# Altium PCB Bopit.PcbDoc
Units mil, origin at the board's own origin, x right, y up, seen from the top; angles counter-clockwise.
Board outline 5765 x 1735 mil, 2 copper layers (Top Layer, Bottom Layer); 16 components, 19 nets, 78 pads, 0 vias.
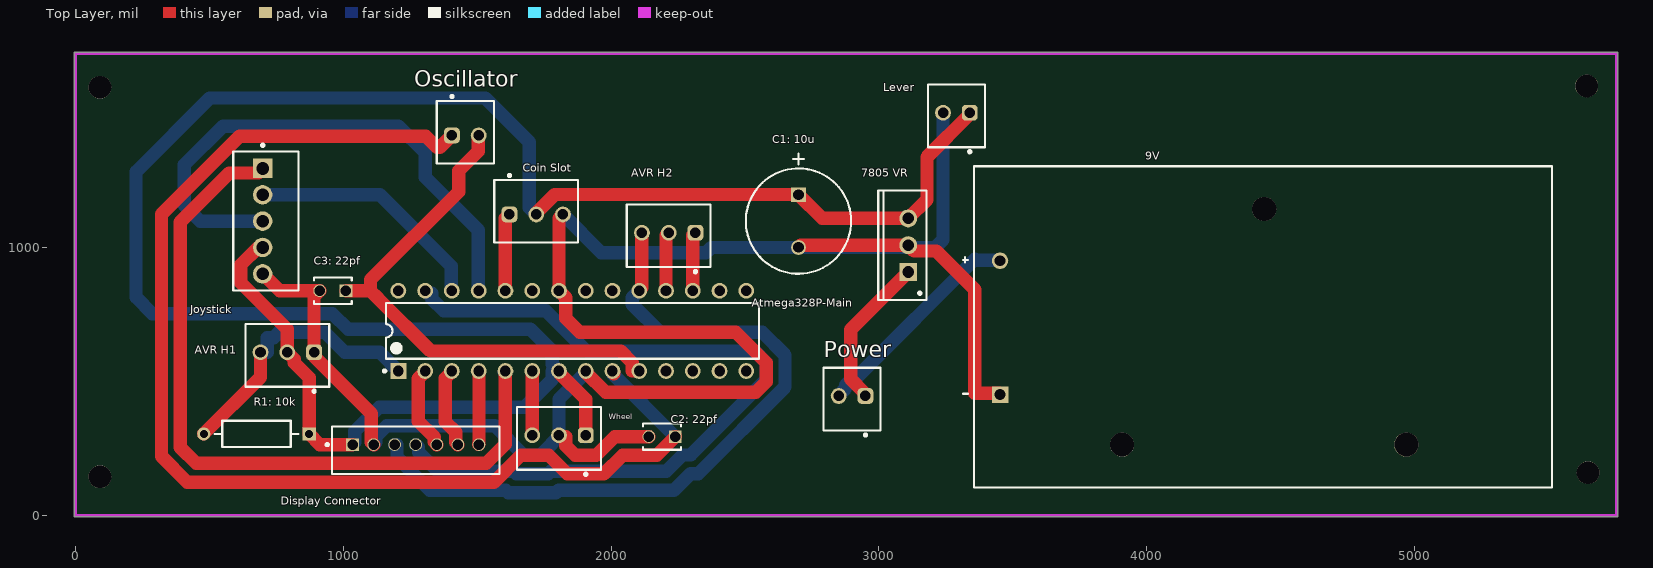
[diagram p0: Top Layer view]
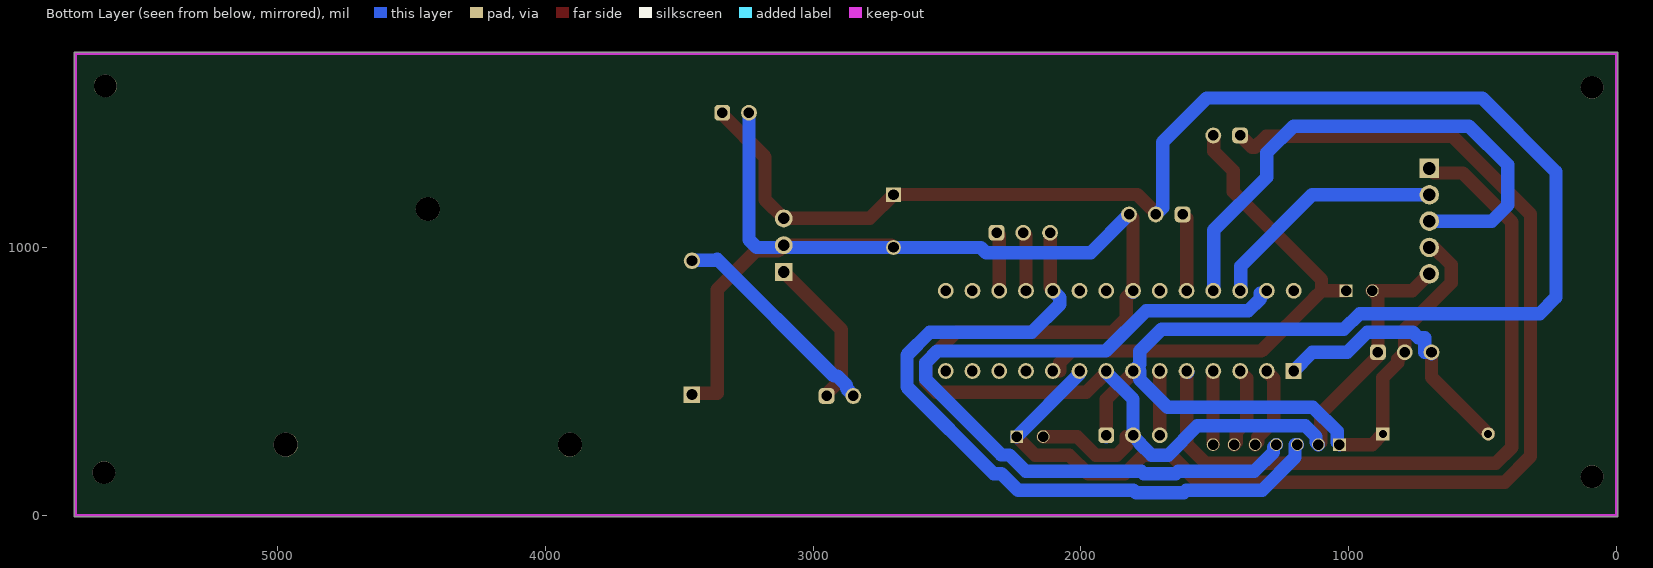
[diagram p1: Bottom Layer view, seen from below]
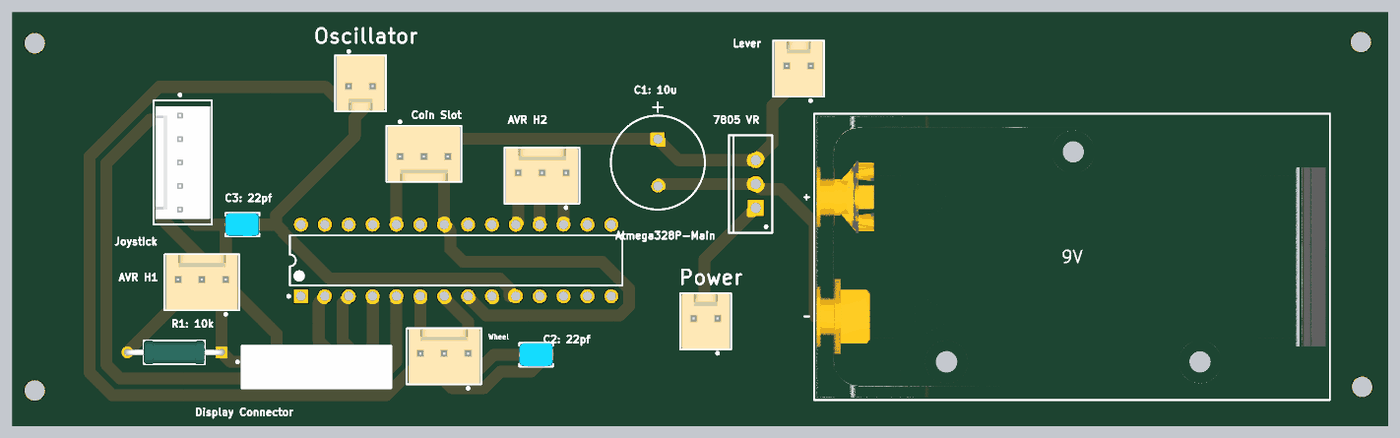
[diagram p2: 3D render of the assembled board from above, using the file's embedded part models]

## Layer stack, top to bottom
Top Solder: solder mask 0.4, Solder Resist, Dk 3.5
Top Layer: signal copper 1.4
Dielectric 1: dielectric 12.6, FR-4, Dk 4.8
Bottom Layer: signal copper 1.4
Bottom Solder: solder mask 0.4, Solder Resist, Dk 3.5

## Board outline
-5,-5 5760,-5 5760,1730 -5,1730

## Design rules (kind name [scope] priority, off if disabled: settings)
BoardOutlineClearance [All] p1: gap=12 ignorepadtopadclearanceinfootprint=FALSE
Clearance [All] p1: gap=20 ignorepadtopadclearanceinfootprint=TRUE except(24: Arc-Via Track-Via SMDPad-Via THPad-Via Via-Via Via-Fill Via-Poly Via-Region Via-Text Via-Hole)
DiffPairsRouting [All] p1: maxlimit=10 minlimit=7 mostfreqgap=10 toplayer_minwidth=6 toplayer_maxwidth=15 toplayer_prefwidth=8 bottomlayer_minwidth=6 bottomlayer_maxwidth=15 bottomlayer_prefwidth=8 maxuncoupledlength=500
HoleSize [All] p1: absolutevalues=TRUE maxlimit=1000 minlimit=39.37 maxpercent=80.000 minpercent=20.000
HoleToHoleClearance [All] p1: gap=17 allowstackedmicrovias=TRUE
PolygonConnect [All] p1: connectstyle=Relief reliefconductorwidth=10 reliefentries=4 polygonreliefangle="90 Angle" airgapwidth=10
RoutingVias [All] p1: holewidth=30 width=35 viastyle="Through Hole" minholewidth=10 minwidth=11 maxholewidth=255 maxwidth=250
SilkToSilkClearance [All] p1: silktosilkclearance=0
SolderMaskExpansion SolderMaskExpansion_1 [All] p1: expansion=4 istentingtop=FALSE
Width [All] p1: maxlimit=10000 minlimit=30 preferedwidth=50 minimp=50.000000 maximp=50.000000 favimp=50.000000
26 further rules are at their usual default settings.

## Components (designator, comment, footprint, x,y, rotation, side; value= is the part's Value field where it differs from the comment)
9V "BH9VPC" FP-BH9VPC-MFG 4435,705 r180 top
"7805 VR" "L7805CV" TO220 3110,1010 r90 top
Atmega328P-Main "ATmega328P-PU" 28P3 1855,690 r90 top
"AVR H1" "61900311121" 61900311121 790,598.19 r0 top
"AVR H2" "61900311121" 61900311121 2215,1045 r0 top
"C1: 10u" "EEU-EE2G100" PNSC-EEU-EE2G100-2_V 2700,1100 r270 top
"C2: 22pf" "RCE5C2A220J0DBH03A" FP-RCE0DB-MFG 2190,295 r180 top
"C3: 22pf" "RCE5C2A220J0DBH03A" FP-RCE0DB-MFG 960,840 r180 top
"Coin Slot" "61900311121" 61900311121 1720,1136.81 r180 top (schematic designator "coin slot")
"Display Connector" "B7B-PH-K-S" FP-B7B-PH-K-S-MFG 1270,243.35 r180 top
Joystick "22-04-1051" FP-22-04-1051-MFG 710,1100 r90 top (schematic designator joystick)
Lever "61900211121" 61900211121 3290,1493.19 r0 top (schematic designator lever)
Oscillator "61900211121" 61900211121 1455,1431.81 r180 top
Power "61900211121" 61900211121 2900,435 r0 top
"R1: 10k" "MRS25000C1002FCT00" FP-MRS25-MFG 675,305 r180 top
Wheel "61900311121" 61900311121 1805,288.19 r0 top

## Footprints (in the part's own frame and the unit in brackets; to place one, negate y for a bottom-side part, rotate by r counter-clockwise, add the part's x,y. Pads: shape width x height; smd on the part's side, far side on the other; paste and mask are expansions set on the pad)
28P3 [mm] "28-Pin Plastic Dual In-Line Package (PDIP)"
  rect 1.5x1.5 hole 1: 1(-3.81,16.51)
  round 1.5 hole 1: 2(-3.81,13.97) 3(-3.81,11.43) 4(-3.81,8.89) 5(-3.81,6.35) 6(-3.81,3.81) 7(-3.81,1.27) 8(-3.81,-1.27) 9(-3.81,-3.81) 10(-3.81,-6.35) 11(-3.81,-8.89) 12(-3.81,-11.43) 13(-3.81,-13.97) 14(-3.81,-16.51) 15(3.81,-16.51) 16(3.81,-13.97) 17(3.81,-11.43) 18(3.81,-8.89) 19(3.81,-6.35) 20(3.81,-3.81) 21(3.81,-1.27) 22(3.81,1.27) 23(3.81,3.81) 24(3.81,6.35) 25(3.81,8.89) 26(3.81,11.43) 27(3.81,13.97) 28(3.81,16.51)
  silkscreen extent -3.93,-17.7 2.65,17.93, body extent -3.6,-17.65 3.6,17.65, height 4.58
61900211121 [mm] "2.54mm Male Locking Header, 2p"
  rrect50% 1.5x1.5 hole 1: 1(1.27,0.3)
  round 1.5 hole 1: 2(-1.27,0.3)
  silkscreen extent -2.71,-3.52 2.71,2.98, body extent -2.54,-2.9 2.54,2.9, height 11.53
61900311121 [mm] "2.54mm Male Locking Header, 3p"
  rrect50% 1.5x1.5 hole 1: 1(2.54,0.3)
  round 1.5 hole 1: 2(0,0.3) 3(-2.54,0.3)
  silkscreen extent -3.98,-3.52 3.98,2.98, body extent -3.81,-2.9 3.81,2.9, height 11.53
FP-22-04-1051-MFG [mm]
  rect 1.85x1.85 hole 1.2 paste-2539.97 mask+0: 1(5,0.3)
  round 1.85 hole 1.2 paste-2539.97 mask+0: 2(2.5,0.3) 3(0,0.3) 4(-2.5,0.3) 5(-5,0.3)
  silkscreen extent -6.6,-3.1 7.32,3.1, body extent -6.7,-3.2 6.7,3.2, height 0.25
FP-B7B-PH-K-S-MFG [mm]
  rect 1.2x1.2 hole 1 paste-2539.97 mask+0: 1(6,-0.55)
  round 1.2 hole 1 paste-2539.97 mask+0: 2(4,-0.55) 3(2,-0.55) 4(0,-0.55) 5(-2,-0.55) 6(-4,-0.55) 7(-6,-0.55)
  silkscreen extent -7.95,-2.25 8.52,2.25, body extent -8.05,-2.35 8.05,2.35, height 0.25
FP-BH9VPC-MFG [mil]
  rect 61.65x61.65 hole 40 paste-99999 mask+0: 1(982,253)
  round 61.65 hole 40 paste-99999 mask+0: 2(982,-247)
  round 90.16 hole 90.16 unplated paste-99999 mask+0: ""(-536,440) ""(-5,-440) ""(526,440)
  silkscreen extent -1080,-600 1121,600, body extent -1084,-604 1084,604, height 10
FP-MRS25-MFG [mm]
  rect 1.25x1.25 hole 0.75 paste-2539.97 mask+0: 1(-5,0)
  round 1.25 hole 0.75 paste-2539.97 mask+0: 2(5,0)
  silkscreen extent -3.98,-1.25 3.98,1.25, body extent -5.72,-1.35 5.72,1.35, height 0.25
FP-RCE0DB-MFG [mm]
  rect 1.2x1.2 hole 1 paste-2539.97 mask+0: 1(-1.25,0)
  round 1.2 hole 1 paste-2539.97 mask+0: 2(1.25,0)
  silkscreen extent -1.8,-1.25 1.8,1.25, body extent -1.95,-1.35 1.95,1.35, height 0.25
PNSC-EEU-EE2G100-2_V [mm] "Through-hole, 2-Leads, Base 10x10mm, Height 22mm"
  rect 1.4x1.4 hole 1: 1(-2.5,0)
  round 1.4 hole 1: 2(2.5,0)
  silkscreen extent -6.4,-5 5,5, body extent -5,-5 5,5, height 22
TO220 [mm] "TO, Thru-Hole, Vertical, Heatsink Mounted; 3 In-Line Leads; Pitch 2.54 mm"
  rect 1.7x1.7 hole 1.1: 1(-2.54,0)
  round 1.7 hole 1.1: 2(0,0) 3(2.54,0)
  silkscreen extent -5.2,-1.75 5.2,2.85, body extent -5.25,-1.8 5.25,2.9, height 19.7

## Part data
9V: library part CMP-136216-000001-1, "BATTERY HOLDER 9V PC PIN", Manufacturer="Memory Protection Devices", Package=0, Voltage Rating=9V, Automotive=No, Category=Batt, ComponentLink2Description=Datasheet, ComponentLink2URL=http://www.memoryprotectiondevices.com/datasheets/BH9VPC-datasheet.pdf, Conn Orientation=Vertical, Contact Material=Nickel, Device Class L1=Connectors, Device Class L2=unset, Device Class L3=unset, Digikey Description="BATTERY HOLDER 9V PC PIN", Height=21.12mm, Is Female=yes, Lead Free=Yes, Manufacturer Part Number=BH9VPC, Number Of Contacts=2, Octopart=https://octopart.com/bh9vpc-memory+protection+devices-22788154, RoHS=TRUE
"7805 VR": library part CMP-0244-00483-1, "Positive Voltage Regulator, 5V, 3-Pin TO-220", ComponentLink1Description="Manufacturer URL", ComponentLink1URL=http://www.st.com, ComponentLink2Description=Datasheet, ComponentLink2URL=http://www.st.com/internet/com/TECHNICAL_RESOURCES/TECHNICAL_LITERATURE/DATASHEET/CD00000444.pdf, ComponentLink3Description="Package Specification", ComponentLink3URL=http://www.st.com/internet/com/TECHNICAL_RESOURCES/TECHNICAL_LITERATURE/PACKAGE_INFORMATION/CD00004649.pdf, DatasheetVersion=16/11/2011, PackageDescription="TO, Thru-Hole, Vertical, Heatsink Mounted; 3 In-Line Leads; Pitch 2.54 mm", PackageReference=TO220, PackageVersion=ver3.0
Atmega328P-Main: library part CMP-0095-00013-2, "8-bit AVR Microcontroller, 32KB Flash, 1KB EEPROM, 2KB SRAM, 28-pin PDIP, Industrial Grade (-40°C to 85°C)", ComponentLink1Description="Manufacturer URL", ComponentLink1URL=http://www.atmel.com/, ComponentLink2Description="ATmega48A/48PA/88A/88PA/168A/168PA/328/328P Datasheet", ComponentLink2URL=http://www.atmel.com/dyn/resources/prod_documents/8271.pdf, ComponentLink3Description="ATmega48A/48PA/88A/88PA/168A/168PA/328/328P Summary", ComponentLink3URL=http://www.atmel.com/dyn/resources/prod_documents/8271S.pdf, DatasheetVersion="revD, May-2011", PackageDescription="28-lead (0.300\"/7.62mm Wide) Plastic Dual Inline Package (PDIP)", PackageReference=28P3, PackageVersion="revB, Sep-2001", RevisionNote="DatasheetVersion updated. URLs added."
"AVR H1" "AVR H2" "Coin Slot" Wheel: library part CMP-1502-00585-2, Color=Beige, Contact Resistance=20mΩ, Current Rating=3A, Flammability Rating="UL94 V-0", Insulation Resistance=1GΩ, Max Operating Temperature=105°C, Min Operating Temperature=-40°C, Operating Supply Voltage=250V, Connector Type="Male Pin", Contact Gender=Male, Contact Material=Copper, Contact Mating Length=7.493mm, Contact Plating=Tin, Fastening Type=Friction, Gender=Male, Height=12.5mm, Housing Material=Nylon, Lead Pitch=2.54mm, Length=7.62mm, Mount="Through Hole", NexarPartId=18818222, Number Of Contacts=3, Number of Pins=3, Number of Positions=3, Number of Rows=1, Orientation=Vertical, Packaging=Bulk, Pitch=2.54mm, REACH SVHC=Unknown, RoHS=Compliant, Termination="Through Hole", Voltage Rating=250V, Width=7.66mm
"C1: 10u": library part CMP-0736-00002-1, "Aluminum Electrolytic Capacitor, 10 uF +/- 20%, 400 V, -25 to 105 degC, 2-Pin 10 x 10 x 22 mm Through-hole, RoHS, Tape and Reel", Capacitance Tolerance="+/- 20%", Manufacturer=Panasonic, Rated Voltage="400 V", Ripple Current="430 mA", Temp. Range="-25 to 105 degC", Cap.="10 uF", ComponentLink1Description="Manufacturer URL", ComponentLink1URL=http://industrial.panasonic.com/, ComponentLink2Description=Datasheet, ComponentLink2URL=http://industrial.panasonic.com/www-data/pdf/ABA0000/ABA0000CE113.pdf, ComponentLink3Description="Package Specification", ComponentLink3URL=http://industrial.panasonic.com/www-data/pdf/ABA0000/ABA0000PE245.pdf, DatasheetVersion=Nov-12, Mounting Technology="Through Hole", PackageDescription="2-Pin Through-hole, Base 10 x 10 mm, Height 22 mm", PackageReference=EEU-EE2G100-2, PackageVersion=Nov-12, Packing="Tape and Reel", PartNumber=EEU-EE2G100, RoHS=TRUE
"C2: 22pf" "C3: 22pf": library part CMP-06035-047347-1, "Cap Ceramic 22pF 100V C0G ±5% Radial 2.5mm +125°C Ammo Pack", Capacitance=22pF, Case/Package=Radial, Dielectric=C0G, Max Operating Temperature=125°C, Min Operating Temperature=-55°C, Package Quantity=2000, Ratings=AEC-Q200, Resistor Type=Ceramic, Tolerance=5%, Voltage=100V, Depth=2.5mm, Height=3.5mm, Height - Seated (Max)=0.138inch, Lead Diameter=0.5mm, Lead Pitch=0.098inch, Lead/Base Style=Straight, Length=3.6mm, Mount="Through Hole", Packaging="Tape and Reel", Termination=Radial, Voltage Rating=100V, Voltage Rating (DC)=100V, Width=0.098inch
"Display Connector": library part CMP-17439-000359-1, "CONN HEADER VERT 7POS 2MM", Color=Natural, Contact Resistance=10mR, Current Rating=2A, Insulation Resistance=1GR, Package Quantity=500, Test Voltage=800V, Connector Type="Male Pin", Contact Material=Bronze, Contact Mating Length=0.13inch, Contact Plating=Tin, Contact Type="Male Pin", Fastening Type=Detent, Gender=Male, Housing Color=Natural, Housing Material=Nylon, Lead Free="Contains Lead", Mount="Through Hole", Number Of Contacts=7, Number of Positions=7, Number of Rows=1, Orientation=Vertical, Packaging=Bulk, Pitch=0.079inch, Series=PH, Termination=Press-Fit
Joystick: library part CMP-00257-00247488-1, "22-04-1051 KK Mini-Latch Straight Male, PCB Header, Through Hole, 1 Rows, 5 Contacts, 2.5mm Pitch", Color=Natural, Contact Resistance=20mΩ, Current Rating=3A, Flammability Rating="UL94 V-0", Insulation Resistance=1GΩ, Manufacturer Lifecycle Status=ACTIVE, Max Operating Temperature=105°C, Max Voltage Rating (AC)=250V, Max Voltage Rating (DC)=250.25kV, Min Operating Temperature=-40°C, Connector Type="Male Pin", Contact Material=Brass, Contact Mating Length=7.493mm, Contact Plating=Tin, Country of Origin=TW, Depth=4.9mm, Fastening Type=Friction, Gender=Male, Glow Wire Compliant=Non-compliant, Halogen Free="Low Halogen", Housing Color=Natural, Housing Material=Nylon, Lead Free="Lead Free", Lead Pitch=2.5mm, Length=12mm, Lifecycle Status=Production, Material=Nylon, Mount="Through Hole", NexarPartId=247488, Number of Circuits=5, Number Of Contacts=5, Number of Pins=5, Number of Positions=5, Number of Rows=1, Orientation=Vertical, Packaging=Bulk, Pitch=2.5mm, Plating=Tin, Radiation Hardening=No, REACH SVHC=Unknown, RoHS=Compliant, Schedule B=8536694040, Termination=Solder, Voltage Rating=250V, Voltage Rating (AC)=250V, Voltage Rating (DC)=250V
Lever Oscillator Power: library part CMP-1502-00584-3, Color=Beige, Contact Resistance=20mΩ, Current Rating=3A, Flammability Rating="UL94 V-0", Insulation Resistance=1GΩ, Max Operating Temperature=105°C, Min Operating Temperature=-40°C, Operating Supply Voltage=250V, Connector Type="Male Pin", Contact Gender=Male, Contact Material=Copper, Contact Mating Length=7.493mm, Contact Plating=Tin, Fastening Type=Friction, Gender=Male, Height=11.75mm, Housing Material=Nylon, Lead Pitch=2.54mm, Length=5.08mm, Mount="Through Hole", NexarPartId=18818218, Number Of Contacts=2, Number of Pins=2, Number of Positions=2, Number of Rows=1, Orientation=Vertical, Packaging=Bulk, Pitch=2.54mm, REACH SVHC=Unknown, RoHS=Compliant, Termination="Through Hole", Voltage Rating=250V, Width=5.12mm
"R1: 10k": library part CMP-00030-42632392-1, "MRS25000C1002FCT00 Resistor, 10 kOhm, ± 1%, 600 mW, Axial Leaded, Metal Film (Thin Film), Professional", Case/Package=Conformal, Max Operating Temperature=155°C, Max Power Dissipation=600mW, Min Operating Temperature=-55°C, Resistance=10kΩ, Temperature Coefficient=50ppm/°C, Tolerance=1%, Voltage Rating=350V, Composition="Metal Film, Thin Film", Contact Plating=Tin, Diameter=2.5mm, Lead Free="Lead Free", Lead Length=26mm, Length=6.5mm, Military Standard=Not, Mount="Through Hole", NexarPartId=42632392, Number of Pins=2, Number of Terminations=2, Power Rating=600mW, Radiation Hardening=No, REACH SVHC=Unknown, RoHS=Compliant, Schedule B="8533210090, 8533210090", Termination=Axial, Voltage Rating (DC)=350V, Width=2.5mm

## Free pads (board coordinates)
  round 85 hole 85: Hole1(90,1600) Hole2(90,145) Hole3(5645,1605) Hole4(5650,160)

## Nets (pads, with @x,y where several pads share a name; then routed paths per layer and width w, separated by ;. In a path a pad name is that pad's centre, name@x,y a point inside that pad or via, vN(x,y) a via of type N, cw(c..) or ccw(c..) an arc to the next point about the centre after c; other vN are vias at no path point)
GND: 9V.1 "7805 VR.2" "AVR H1.1" "C1: 10u.2" "C2: 22pf.2" "C3: 22pf.2" "Coin Slot.3" "Display Connector.2" Atmega328P-Main.8 Atmega328P-Main.22 Joystick.5 Lever.2 Wheel.2 | length 7646.9
  Top Layer w50: Joystick.5 761.34,840 910.79,840 890,819.21 890,610 890,594.95 1103.78,381.17 1103.78,273.74 1112.52,265 ; Wheel.2 1810,295 1830.47,295 1830.47,260.48 1865.48,225.47 1944.52,225.47 2014.05,295 2140.79,295 ; 1820,1125 1805,1110 Atmega328P-Main.22 1830.47,814.53 1830.47,737.41 1883.36,684.53 2465.87,684.53 2579.53,570.87 2579.53,499.53 2540,460 1979.6,460 1905,534.6 Atmega328P-Main.8 ; 2700,1001.57 2708.43,1010 3110,1010 3131.54,988.46 3214.22,988.46 3358,844.68 3358,457 3448,457 9V.1
  Bottom Layer w50: 1112.52,265 1121.26,273.74 1121.26,293.99 1162.26,335 1564.6,335 1674.13,225.47 1735.87,225.47 1779.53,269.13 1779.53,272.08 1805,297.55 1805,434.6 1905,534.6 Atmega328P-Main.8 ; Atmega328P-Main.22@1805,834.6 Atmega328P-Main.22 ; 1820,1125 1962.72,982.28 2354.52,982.28 2373.81,1001.57 2700,1001.57 3096.99,1001.57 3102.18,1006.76 3105.42,1006.76 3110,1002.18 3114.58,1006.76 3125.21,1006.76 3130.4,1001.57 3210.71,1001.57 3240,1030.86 Lever.2
Net9V_2: 9V.2 Power.2 | length 822.4
  Bottom Layer w50: Power.2@2850,449 2850,449.26 2875.47,474.73 2875.47,486.33 2910.48,521.34 2922.34,521.34 3358,957 3360.77,954.23 3450.77,954.23 9V.2
"Net7805 VR_1": "7805 VR.1" Power.1 | length 566.8
  Top Layer w50: Power.1@2950,455 2895,510 2895,695 3110,910
"Net7805 VR_3": "7805 VR.3" "AVR H1.2" "C1: 10u.1" "Coin Slot.2" "Display Connector.1" "R1: 10k.1" Atmega328P-Main.7 Joystick.4 Lever.1 Wheel.1 | length 8315.9
  Top Layer w50: Joystick.4 681.47,1001.57 616.77,936.87 616.77,869.43 790,696.2 790,610 815.47,584.53 815.47,570.48 871.85,514.1 871.85,305 911.85,265 1033.78,265 ; 1720,1125 1720,1130.4 1789.13,1199.53 2700,1199.53 2700,1198.43 2788.43,1110 3110,1110 3180,1180 3180,1339.6 3340,1499.6 Lever.1 ; Atmega328P-Main.7 1805,534.6 1905,434.6 Wheel.1
  Bottom Layer w50: 1033.78,265 1042.52,273.74 1042.52,314.25 1133.27,405 1676.4,405 1779.53,508.12 1779.53,540 Atmega328P-Main.7 1779.53,565.47 1779.53,614.53 1698.58,695.47 1017.57,695.47 958.51,754.53 285.47,754.53 225,815 225,1285 500,1560 1530,1560 1694.53,1395.47 1694.53,1150.47 1720,1125 ; Wheel.1@1905,294.6 Wheel.1
NetAtmega328P-Main_1: "AVR H1.3" "R1: 10k.2" Atmega328P-Main.1 | length 1040.4
  Top Layer w50: 478.15,305 690,516.85 690,610
  Bottom Layer w50: 690,604.6 690,610 715.47,610 715.47,664.53 739.13,664.53 759.13,684.53 929.52,684.53 1004.05,610 1135,610 Atmega328P-Main.1 Atmega328P-Main.1@1205,535.47
NetAtmega328P-Main_2: "Display Connector.5" Atmega328P-Main.2 | length 314.2
  Top Layer w50: Atmega328P-Main.2 1305,537.55 1279.53,512.08 1279.53,352.52 1338.62,293.42 1338.62,275.12 1348.74,265
NetAtmega328P-Main_3: "Display Connector.6" Atmega328P-Main.3 | length 305
  Top Layer w50: Atmega328P-Main.3 1405,537.55 1380,512.55 1380,351.04 1418.74,312.3 1418.74,273.74 1427.48,265
NetAtmega328P-Main_4: "Display Connector.7" Atmega328P-Main.4 | length 274.9
  Top Layer w50: Atmega328P-Main.4 1506.22,538.78 1506.22,266.95 1505.25,265.97
NetAtmega328P-Main_5: Atmega328P-Main.5 Joystick.1 | length 2783.2
  Top Layer w50: Joystick.1 681.18,1279.84 572.99,1279.84 390,1096.85 390,254.29 449.29,195 1533.27,195 1605,266.73 Atmega328P-Main.5
  Bottom Layer w50: Atmega328P-Main.5@1600,535 Atmega328P-Main.5
NetAtmega328P-Main_6: Atmega328P-Main.6 Wheel.3 | length 247.1
  Top Layer w50: Wheel.3 Atmega328P-Main.6 Atmega328P-Main.6@1710,535
NetAtmega328P-Main_9: "C2: 22pf.1" Atmega328P-Main.9 Oscillator.1 | length 4588.3
  Top Layer w50: Oscillator.1 1360,1375 1350,1375 1307.68,1417.32 611.48,1417.32 320,1125.85 320,221.01 416.01,125 1562.26,125 1662.26,225 1766.96,225 1836.49,155.47 1973.51,155.47 2043.04,225 2170,225 2240,295 ; Atmega328P-Main.9 2005,537.55 2009.53,533.02 Atmega328P-Main.9@2009.53,530.07
  Bottom Layer w50: Atmega328P-Main.9 2005,529.21 2239.21,295
NetAtmega328P-Main_10: "C3: 22pf.1" Atmega328P-Main.10 Oscillator.2 | length 1986.2
  Top Layer w50: 1009.21,840 1100.71,840 ; Oscillator.2 1503.27,1418.27 1503.27,1361.64 1430,1288.37 1430,1210 1100.71,880.71 1100.71,840 ; Atmega328P-Main.10 2079.53,540 2079.53,570.87 2035.87,614.53 1325.07,614.53 1130,809.6 1130,810.71 1100.71,840
NetAtmega328P-Main_17: "AVR H2.1" Atmega328P-Main.17 | length 221
  Top Layer w50: Atmega328P-Main.17 2305,1046.81 2315,1056.81
NetAtmega328P-Main_18: "AVR H2.2" Atmega328P-Main.18 | length 221
  Top Layer w50: Atmega328P-Main.18 2205,1046.81 2215,1056.81
NetAtmega328P-Main_19: "AVR H2.3" "Display Connector.3" Atmega328P-Main.19 | length 2774.8
  Top Layer w50: Atmega328P-Main.19 2115,850 2115,1056.81
  Bottom Layer w50: 1191.26,265 1200,265 1200,217.7 1322.7,95 1606.61,95 1616.14,85.47 1793.86,85.47 1803.39,95 2235,95 2296.38,156.38 2325.77,156.38 2649.53,480.13 2649.53,599.87 2564.87,684.53 2183.36,684.53 2079.53,788.36 2079.53,814.53 Atmega328P-Main.19
NetAtmega328P-Main_24: "Coin Slot.1" Atmega328P-Main.24 | length 291.2
  Top Layer w50: Atmega328P-Main.24 1605,1110 1620,1125
NetAtmega328P-Main_25: Atmega328P-Main.25 Joystick.3 | length 2074
  Top Layer w50: Joystick.3 Joystick.3@704.37,1100
  Bottom Layer w50: Joystick.3 465,1100 405,1160 405,1310 550,1455 1205.71,1455 1305.94,1354.77 1305.94,1264.06 1503.27,1066.73 1503.27,841.73 Atmega328P-Main.25
NetAtmega328P-Main_26: Atmega328P-Main.26 Joystick.2 | length 914.2
  Bottom Layer w50: Joystick.2@702.56,1202.79 Joystick.2 1136.57,1198.43 1403.27,931.73 1403.27,841.73 Atmega328P-Main.26
NetAtmega328P-Main_27: "Display Connector.4" Atmega328P-Main.27 | length 2972.1
  Bottom Layer w50: 1270,265 1280.12,254.88 1280.12,236.58 1351.69,165 1635.61,165 1645.13,155.47 1764.87,155.47 1774.39,165 2206.01,165 2267.38,226.38 2296.78,226.38 2579.53,509.13 2579.53,570.87 2535.87,614.53 1906.58,614.53 1755.64,765.47 1374.13,765.47 1330.47,809.13 1330.47,830 1315,830 Atmega328P-Main.27
pads on no net: 9V. Atmega328P-Main.11 Atmega328P-Main.12 Atmega328P-Main.13 Atmega328P-Main.14 Atmega328P-Main.15 Atmega328P-Main.16 Atmega328P-Main.20 Atmega328P-Main.21 Atmega328P-Main.23 Atmega328P-Main.28
copper on no net: | length 4.4
  Top Layer w50: 5646.91,163.09 5650,160

## Keep-outs
Keep-Out Layer:
  lines w10: 0,0 5700,0 5755,0 5755,1725 0,1725 0,0